# Altium PCB TE16A_Footprint.pcbdoc
Units mil, origin at the board's own origin, x right, y up, seen from the top; angles counter-clockwise.
Board outline 3130 x 2265 mil, 2 copper layers (Top Layer, Bottom Layer); 1 components, 0 nets, 106 pads, 0 vias.
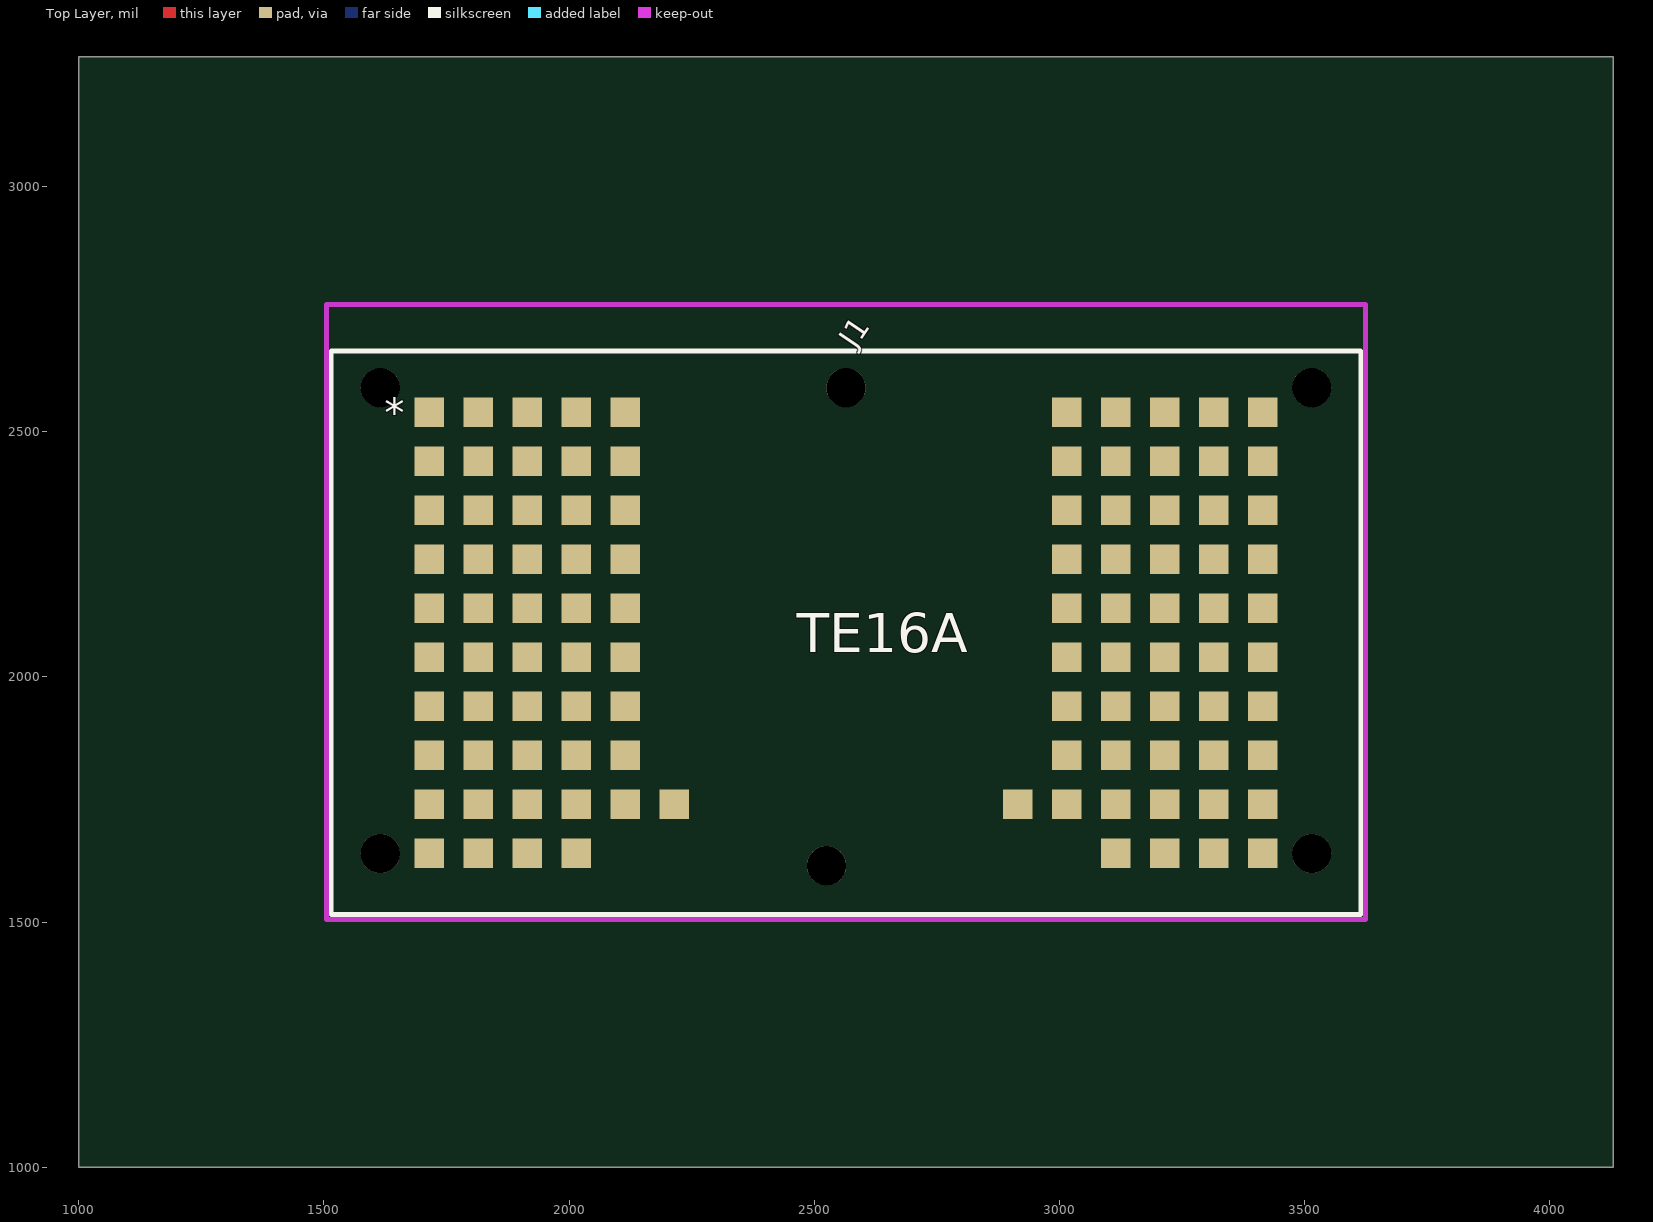
[diagram p0: Top Layer view]
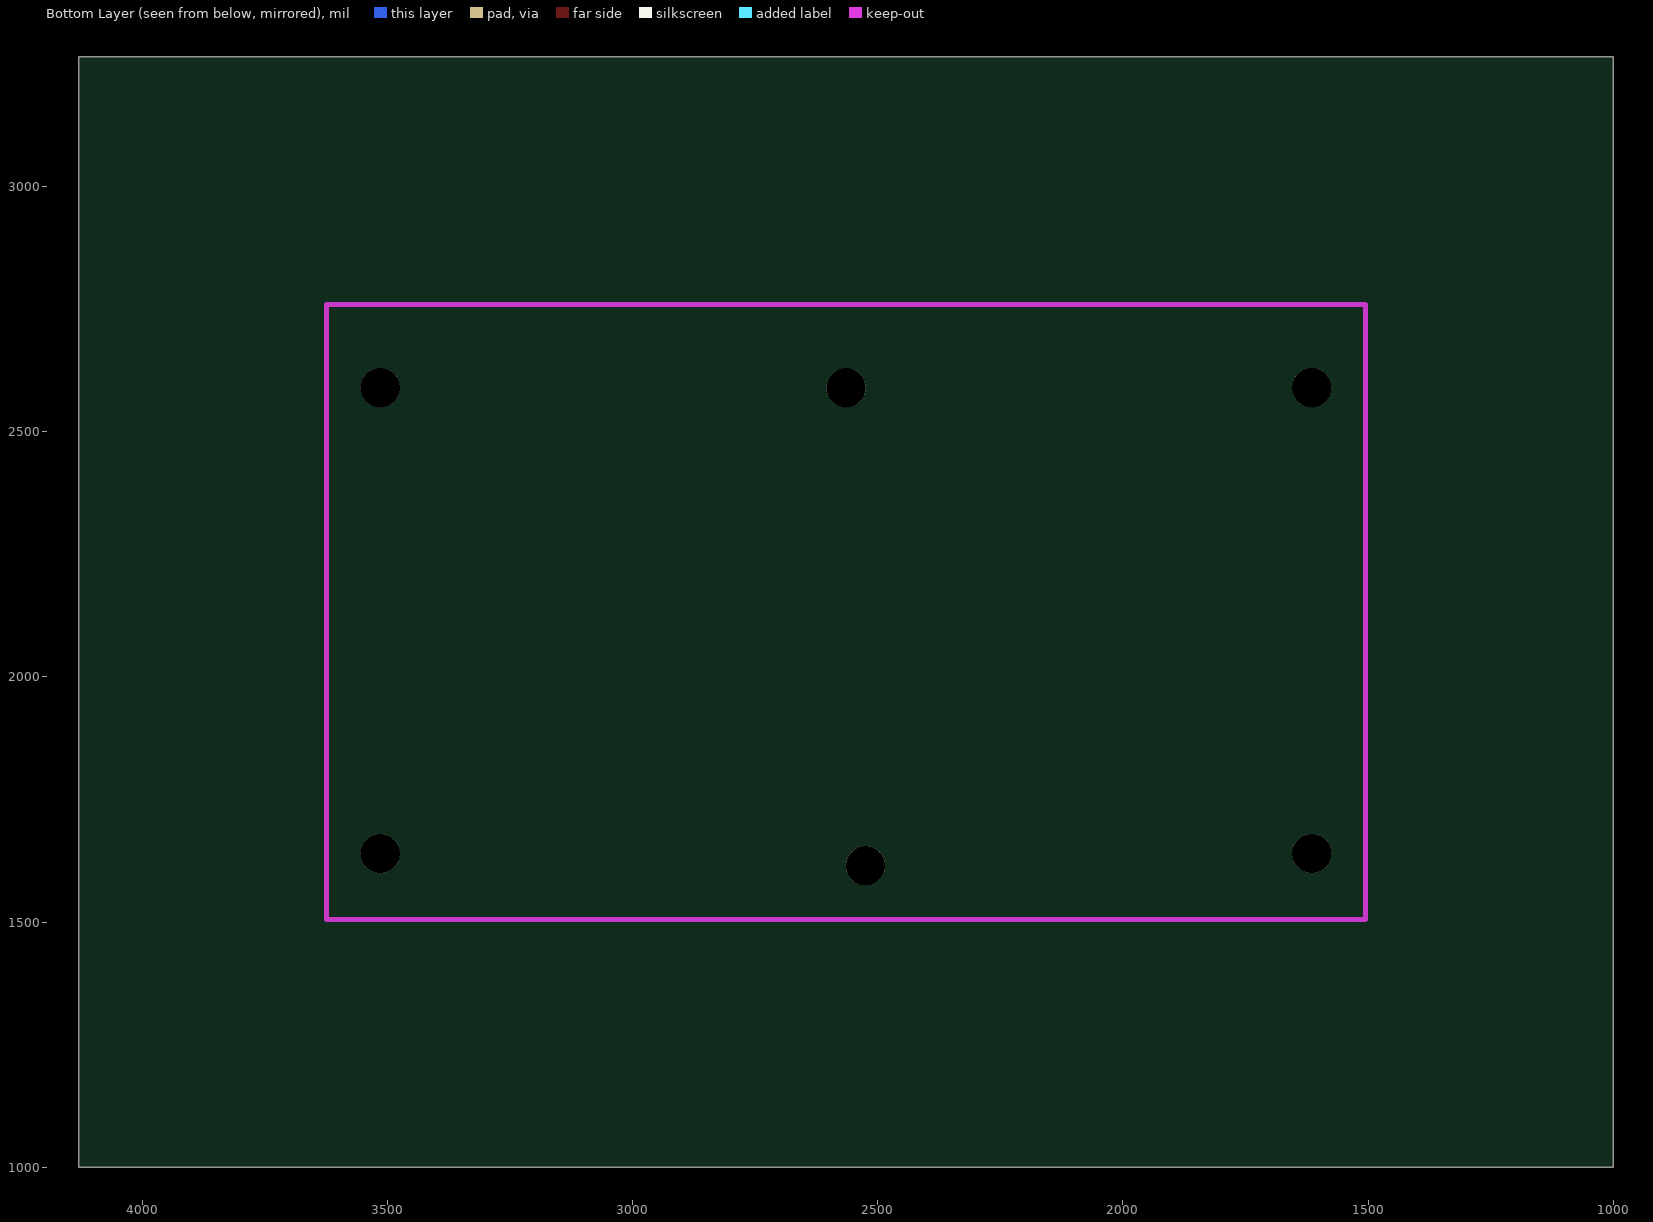
[diagram p1: Bottom Layer view, seen from below]

## Layer stack, top to bottom
Top Layer: signal copper (thickness not stored)
Dielectric: dielectric 12.6, FR-4, Dk 4.8
Bottom Layer: signal copper (thickness not stored)

## Board outline
4130,1000 1000,1000 1000,3265 4130,3265

## Components (designator, comment, footprint, x,y, rotation, side; value= is the part's Value field where it differs from the comment)
J1 "LGA-100-TE16A" LGA-100-TE16A 2615,2140 r0 top

## Footprints (in the part's own frame and the unit in brackets; to place one, negate y for a bottom-side part, rotate by r counter-clockwise, add the part's x,y. Pads: shape width x height; smd on the part's side, far side on the other; paste and mask are expansions set on the pad)
LGA-100-TE16A [mil]
  rect 60x60 smd: 1(-900,400) 2(-800,400) 3(-700,400) 4(-600,400) 5(-500,400) 6(-900,300) 7(-800,300) 8(-700,300) 9(-600,300) 10(-500,300) 11(-900,200) 12(-800,200) 13(-700,200) 14(-600,200) 15(-500,200) 16(-900,100) 17(-800,100) 18(-700,100) 19(-600,100) 20(-500,100) 21(-900,0) 22(-800,0) 23(-700,0) 24(-600,0) 25(-500,0) 26(-900,-100) 27(-800,-100) 28(-700,-100) 29(-600,-100) 30(-500,-100) 31(-900,-200) 32(-800,-200) 33(-700,-200) 34(-600,-200) 35(-500,-200) 36(-900,-300) 37(-800,-300) 38(-700,-300) 39(-600,-300) 40(-500,-300) 41(-900,-400) 42(-800,-400) 43(-700,-400) 44(-600,-400) 45(-500,-400) 46(-400,-400) 47(-900,-500) 48(-800,-500) 49(-700,-500) 50(-600,-500) 51(500,-500) 52(600,-500) 53(700,-500) 54(800,-500) 55(300,-400) 56(400,-400) 57(500,-400) 58(600,-400) 59(700,-400) 60(800,-400) 61(400,-300) 62(500,-300) 63(600,-300) 64(700,-300) 65(800,-300) 66(400,-200) 67(500,-200) 68(600,-200) 69(700,-200) 70(800,-200) 71(400,-100) 72(500,-100) 73(600,-100) 74(700,-100) 75(800,-100) 76(400,0) 77(500,0) 78(600,0) 79(700,0) 80(800,0) 81(400,100) 82(500,100) 83(600,100) 84(700,100) 85(800,100) 86(400,200) 87(500,200) 88(600,200) 89(700,200) 90(800,200) 91(400,300) 92(500,300) 93(600,300) 94(700,300) 95(800,300) 96(400,400) 97(500,400) 98(600,400) 99(700,400) 100(800,400)
  round 80 hole 80 unplated: ""(-1000,-500) ""(-1000,450) ""(-90,-525) ""(-50,450) ""(900,-500) ""(900,450)
  silkscreen extent -1100,-625 1000,525

## Nets (pads, with @x,y where several pads share a name; then routed paths per layer and width w, separated by ;. In a path a pad name is that pad's centre, name@x,y a point inside that pad or via, vN(x,y) a via of type N, cw(c..) or ccw(c..) an arc to the next point about the centre after c; other vN are vias at no path point)
pads on no net: J1. J1.1 J1.2 J1.3 J1.4 J1.5 J1.6 J1.7 J1.8 J1.9 J1.10 J1.11 J1.12 J1.13 J1.14 J1.15 J1.16 J1.17 J1.18 J1.19 J1.20 J1.21 J1.22 J1.23 J1.24 J1.25 J1.26 J1.27 J1.28 J1.29 J1.30 J1.31 J1.32 J1.33 J1.34 J1.35 J1.36 J1.37 J1.38 J1.39 J1.40 J1.41 J1.42 J1.43 J1.44 J1.45 J1.46 J1.47 J1.48 J1.49 J1.50 J1.51 J1.52 J1.53 J1.54 J1.55 J1.56 J1.57 J1.58 J1.59 J1.60 J1.61 J1.62 J1.63 J1.64 J1.65 J1.66 J1.67 J1.68 J1.69 J1.70 J1.71 J1.72 J1.73 J1.74 J1.75 J1.76 J1.77 J1.78 J1.79 J1.80 J1.81 J1.82 J1.83 J1.84 J1.85 J1.86 J1.87 J1.88 J1.89 J1.90 J1.91 J1.92 J1.93 J1.94 J1.95 J1.96 J1.97 J1.98 J1.99 J1.100

## Silkscreen, mask and mechanical layers (free items; w line width, h text height)
Document:
  lines w0.1: 2564.99,2132.49 2565.01,2132.51

## Text inside footprints (layer, text, board x,y; h text height)
J1: Top Overlay "TE16A" at 2465,2050 h80; Top Overlay "*" at 1665,2595 h60 r180